# Altium PCB 边缘网关-17KF4-END.PcbDoc (part 2 of 2)
Units mil, origin at the board's own origin, x right, y up, seen from the top; angles counter-clockwise.
Board outline 8695 x 6025 mil, 2 copper layers (Top Layer, Bottom Layer); 152 components, 173 nets, 594 pads, 724 vias.
Unrouted connection lines stored in the file: 769.
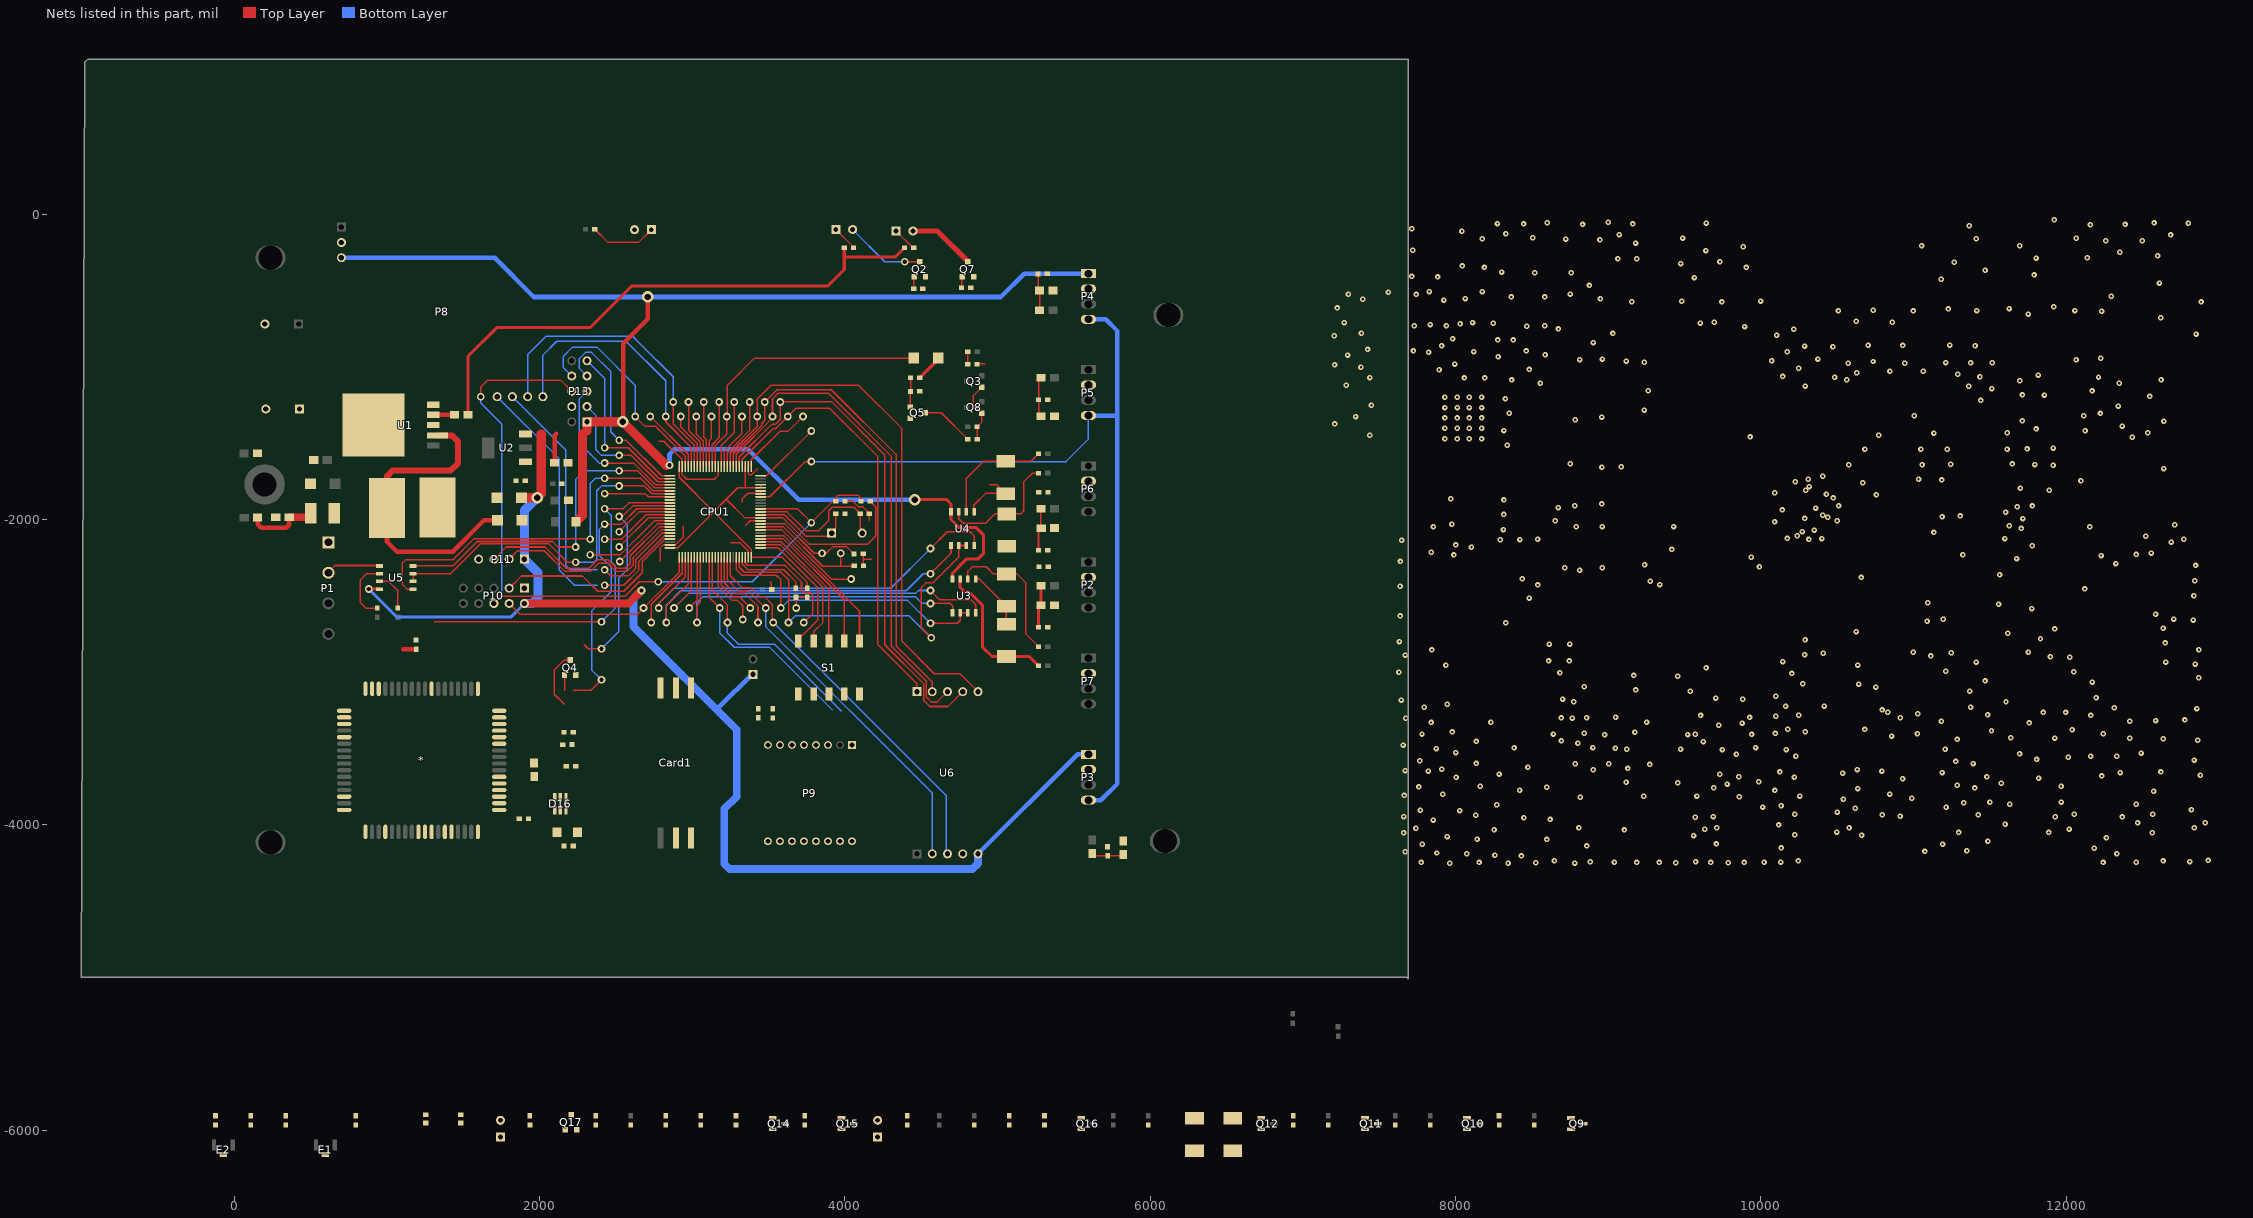
[diagram p2: the nets of this part, all layers, seen from the top]

## Via types
v1: diameter 36, hole 15, Top Layer to Bottom Layer, 626 vias
v2: diameter 50, hole 28, Top Layer to Bottom Layer, 92 vias
v3: diameter 75, hole 42, Top Layer to Bottom Layer, 6 vias

## Nets (pads, with @x,y where several pads share a name; then routed paths per layer and width w, separated by ;. In a path a pad name is that pad's centre, name@x,y a point inside that pad or via, vN(x,y) a via of type N, cw(c..) or ccw(c..) an arc to the next point about the centre after c; other vN are vias at no path point) (continued)
GND: *.1 *.4 *.18 *.19 *.23 *.24 *.34 *.35 *.42 *.52 *.53 *.55 *.57 *.66 *.68 C1.2 C2.1 C3.1 C4.2 C5.1 C6.1 C7.2 C8.2 C9.1 C10.1 C11.1 C12.1 C16.1 C17.1 C18.1 C19.2 C20.1 C21.1 C22.1 C23.1 C25.1 C28.1 C29.1 C30.1 CPU1.10 CPU1.19 CPU1.20 CPU1.27 CPU1.37 CPU1.49 CPU1.74 CPU1.99 D4.1 D5.1 D6.1 D8.1 D9.1 D11.2 D16.2 P1.2 P2.2 P3.2 P4.2 P5.2 P6.2 P7.2 P8.6 P9.14 P9.16 P10.1 P11.4 P13.7 Q2.2 Q4.2 Q5.1 Q7.2 Q14.2 Q17.2 R13.2 R14.1 R15.2 R16.2 R17.2 R18.2 R19.1 R38.1 R39.1 R41.2 R47.2 R50.2 R64.1 R70.2 S1.1 S1.2 S1.3 S1.4 S1.5 U1.3 U1.5 U2.1 U3.5 U4.5 U5.5 U6.9 | length 3265.4
  Top Layer w10: P1.2@614.16,-2345.77 658.75,-2301.18 U5.5@947.92,-2301.18 ; 2780.16,-1486.77 2813.16,-1486.77 2931.62,-1605.24 2931.62,-1649.53 2931.62,-1704.24 2963.47,-1736.09 3143.74,-1736.09 3168.83,-1711 CPU1.37@3168.83,-1652.27 ; 2788.14,-2274.51 2788.14,-2187.43 2809.52,-2166.05 2851.9,-2166.05 2852.68,-2165.27 2889.26,-2165.27 2941.16,-2113.37 2941.16,-2042.77 ; CPU1.37@3167.84,-1652.27 CPU1.37@3167.84,-1649.53 ; 3251.16,-2152.77 3312.16,-2152.77 3364.69,-2205.31 CPU1.99@3364.69,-2244.02 ; 3326,-1887 3326,-1864.93 3342.97,-1847.97 ; 3337,-1853.93 3342.97,-1847.97 ; 3351.16,-2033.77 3351.16,-2036.77 3379.36,-2008.57 CPU1.10@3446.39,-2008.57 ; CPU1.27@3364.69,-1649.53 3364.69,-1698.77 3372.69,-1706.77 3388.16,-1706.77 3426.16,-1668.77 ; CPU1.19@3445.4,-1828.66 3362.27,-1828.66 3342.97,-1847.97 ; CPU1.19@3447.24,-1826.82 CPU1.20@3447.24,-1812.2 ; 3509.16,-2407.77 3518.39,-2417 R47.2@3518.39,-2455.43 ; C22.1@3998.16,-1877.77 4049.07,-1877.77 4089.07,-1917.77 4118.16,-1917.77 4158.16,-1957.77 4158.16,-2004.77 ; C23.1@4119.16,-2299.77 4119.16,-2258.77 ; C25.1@4119.16,-2223.77 4119.16,-2258.77 ; 4175.16,-2258.77 4119.16,-2258.77 ; U4.5@4843.75,-1946.54 4843.75,-1907.18 4923.86,-1827.07 5051.16,-1827.07 4997.86,-1773.77 4948.16,-1773.77 ; U3.5@4853.75,-2386.54 4876.62,-2386.54 4972.86,-2482.77 5055.92,-2566.31 D5.1@5055.92,-2681.69 ; R41.2@4863.39,-980.43 4915.82,-980.43
  Top Layer w30: 1105.21,-2848.71 R38.1@1188.71,-2848.71
  other v1: 7961.16,-4251.77 8344.16,-4251.77 8780.16,-4250.77 8526.16,-4247.77 9442.16,-4247.77 9786.16,-4247.77 7775.16,-4246.77 8154.16,-4246.77 9186.16,-4246.77 9334.16,-4246.77 9672.16,-4246.77 9892.16,-4246.77 12242.16,-4246.77 9041.16,-4244.77 10021.16,-4244.77 12460.16,-4244.77 10131.16,-4243.77 9572.16,-4242.77 8882.16,-4241.77 12809.16,-4240.77 12635.16,-4236.77 10245.16,-4235.77 8648.16,-4234.77 12931.16,-4233.77 8430.16,-4203.77 8258.16,-4198.77 8073.16,-4189.77 12333.16,-4189.77 7878.16,-4184.77 7670.16,-4176.77 11075.16,-4174.77 11350.16,-4170.77 12185.16,-4153.77 10134.16,-4151.77 8859.16,-4138.77 7781.16,-4127.77 11190.16,-4126.77 9709.16,-4125.77 11488.16,-4107.77 8597.16,-4095.77 8141.16,-4094.77 12264.16,-4085.77 7946.16,-4076.77 9559.16,-4070.77 10660.16,-4067.77 10222.16,-4065.77 7659.16,-4052.77 12564.16,-4051.77 11296.16,-4049.77 11886.16,-4049.77 10497.16,-4047.77 9106.16,-4033.77 8252.16,-4032.77 9632.16,-4028.77 12019.16,-4027.77 7740.16,-4021.77 9711.16,-4019.77 8808.16,-4018.77 10578.16,-4018.77 12840.16,-4018.77 10116.16,-4000.77 11600.16,-3995.77 12468.16,-3985.77 12911.16,-3985.77 7853.16,-3968.77 8619.16,-3964.77 8448.16,-3953.77 9570.16,-3949.77 12368.16,-3948.77 11928.16,-3947.77 7661.16,-3945.77 9689.16,-3945.77 10912.16,-3944.77 8132.16,-3937.77 10795.16,-3934.77 11425.16,-3934.77 10222.16,-3931.77 12054.16,-3930.77 12568.16,-3930.77 10500.16,-3916.77 8028.16,-3906.77 7770.16,-3904.77 12821.16,-3901.77 10619.16,-3890.77 11213.16,-3884.77 10011.16,-3883.77 10132.16,-3874.77 8270.16,-3867.77 12459.16,-3865.77 11631.16,-3864.77 11330.16,-3855.77 11501.16,-3852.77 11968.16,-3850.77 10541.16,-3832.77 10988.16,-3825.77 8816.16,-3818.77 9858.16,-3815.77 9232.16,-3812.77 9581.16,-3811.77 10254.16,-3811.77 7663.16,-3807.77 7915.16,-3799.77 10844.16,-3798.77 12573.16,-3779.77 10092.16,-3774.77 8419.16,-3773.77 10634.16,-3762.77 11402.16,-3758.77 9691.16,-3757.77 8597.16,-3753.77 7760.16,-3751.77 8161.16,-3747.77 11967.16,-3746.77 11287.16,-3741.77 9779,-3733 11575.16,-3727.77 9456.16,-3723.77 9117.16,-3720.77 9987.16,-3717.77 10928.16,-3697.77 11819.16,-3695.77 10220.16,-3688.77 8003.16,-3687.77 11481.16,-3685.77 9855.16,-3684.77 12233.16,-3679.77 12880.16,-3675.77 9730.16,-3668.77 8285.16,-3667.77 10535.16,-3661.77 11187.16,-3657.77 12355.16,-3657.77 10125.16,-3653.77 12621.16,-3653.77 7820.16,-3647.77 10793.16,-3647.77 7671.16,-3644.77 8901.16,-3638.77 10631.16,-3637.77 7910.16,-3635.77 9129.16,-3630.77 8474.16,-3622.77 9273.16,-3604.77 8784.16,-3599.77 9004.16,-3599.77 11390.16,-3598.77 8136.16,-3597.77 11276.16,-3584.77 7765.16,-3580.77 12838.16,-3575.77 11806.16,-3571.77 12014.16,-3557.77 12160.16,-3551.77 12331.16,-3551.77 10230.16,-3550.77 9840.16,-3537.77 11695.16,-3533.77 12491.16,-3529.77 8001.16,-3526.77 9748.16,-3506.77 10167.16,-3506.77 9122.16,-3505.77 9474.16,-3504.77 11207.16,-3504.77 7873.16,-3500.77 9047.16,-3497.77 8383.16,-3494.77 8900.16,-3493.77 9965.16,-3493.77 7656.16,-3477.77 8802.14,-3465.51 9623.16,-3454.77 8135.16,-3453.77 8694,-3450 12863.16,-3445.77 11286.16,-3440.77 12637.16,-3436.77 12417.16,-3433.77 11925.16,-3431.77 11637.16,-3429.77 10856.16,-3418.77 8976.16,-3410.77 9520.16,-3408.77 9939.16,-3407.77 9570.14,-3406.51 7780.16,-3405.77 8641.16,-3405.77 11026.16,-3403.77 12244.16,-3402.77 10094.16,-3401.77 8843.16,-3400.77 9175.16,-3392.77 7979.16,-3391.77 10290.16,-3390.77 11511.16,-3383.77 12039.16,-3376.77 10681,-3375 10176,-3374 9724.16,-3348.77 9877.16,-3333.77 11759.16,-3332.77 7839.16,-3329.77 8232.16,-3327.77 9251.16,-3327.77 12417.16,-3321.77 11183.16,-3320.77 12586.16,-3316.77 12778.16,-3312.77 7674.16,-3302.77 8764.14,-3300.51 8693.16,-3299.77 8858.16,-3298.77 10913.16,-3298.77 9926,-3297 9048.16,-3295.77 10097.16,-3289.77 9605.16,-3283.77 12162.16,-3283.77 10248.16,-3282.77 11485.16,-3278.77 11027.16,-3272.77 11850.16,-3263.77 11996.16,-3263.77 10832,-3262 10794.16,-3247.77 12857.16,-3238.77 12316.16,-3232.77 11374.16,-3230.77 7794.16,-3229.77 10162.16,-3223.77 10415.16,-3221.77 7945.16,-3210.77 11606.16,-3194.77 8774.16,-3193.77 7644.16,-3182.77 9882.16,-3177.77 8701.14,-3176.51 9704.16,-3169.77 12196.16,-3167.77 10097.16,-3158.77 9538.16,-3125.77 11369.16,-3125.77 9180.16,-3116.77 10753.16,-3097.77 8843.16,-3094.77 10641.16,-3077.77 10274.16,-3076.77 12171.16,-3064.77 11469.16,-3057.77 12868.16,-3035.77 9455,-3026 9168.16,-3021.77 10202.16,-3008.77 8684.16,-3003.77 7629.16,-2999.77 12049.16,-2997.77 11212.16,-2993.77 9641.16,-2970.77 7937.16,-2954.77 10634.16,-2953.77 12845.16,-2946.77 11411.16,-2933.77 12653.16,-2933.77 10143.16,-2930.77 8609.16,-2926.77 8745.16,-2926.77 12023.16,-2902.77 11897.16,-2899.77 11113.16,-2893.77 7671.16,-2887.77 10286.14,-2885.51 10408.16,-2876.77 11247.16,-2873.77 11753.16,-2869.77 10999.16,-2868.77 7843.16,-2854.77 12870.16,-2852.77 8614.16,-2815.77 8748.16,-2815.77 12649.16,-2808.77 7632.16,-2799.77 10290,-2787 11832.16,-2780.77 11617.16,-2745.77 10625,-2734 11926.16,-2716.77 12635.16,-2711.77 8328.16,-2675.77 11089.16,-2665.77 12832.16,-2658.77 11195.16,-2652.77 12705.16,-2651.77 7637.16,-2631.77 12586.16,-2620.77 11774.14,-2583.51 11557.16,-2555.77 11093.16,-2544.77 8482.16,-2514.77 12837.16,-2498.77 12121.86,-2454.77 7636.16,-2436.77 8538.16,-2428.77 9337.16,-2425.77 9275.16,-2404.77 12842.16,-2400.77 8437.16,-2387.77 10658.16,-2379.77 11564.16,-2361.77 8812.16,-2332.77 8716.16,-2316.77 8961.16,-2315.77 9991,-2310 12848.16,-2300.77 9238.16,-2296.77 12326.16,-2288.77 7639.16,-2274.77 11675.16,-2255.77 9937.14,-2246.51 12229.16,-2235.77 7989.16,-2231.77 11324.16,-2230.77 12459.16,-2228.77 12558.16,-2219.77 7840.16,-2213.77 9417.16,-2195.77 8104.16,-2181.77 11778.16,-2171.77 8002.16,-2166.77 12689.16,-2147.77 7646.16,-2135.77 8293,-2133 8422,-2131 10315.16,-2130.77 8537,-2129 12770.16,-2128.77 10400.16,-2124.77 11599.16,-2124.77 10173.16,-2123.77 12522.16,-2108.77 10239,-2106 11134.16,-2084.77 10271,-2079 10350,-2069 8314,-2066 11706.16,-2058.77 7855.16,-2046.77 8791.16,-2046.77 12154.16,-2046.77 8961.16,-2045.77 9428.16,-2045.77 11627.16,-2040.77 12711.16,-2034.77 7976.16,-2031.77 10090.16,-2014.77 10500.16,-2008.77 8654,-2008 11717.16,-1993.77 10288,-1993 10439,-1986 11187.16,-1982.77 11307.16,-1976.77 10405,-1972 8315,-1967 11603.16,-1951.77 10140,-1937 10358.16,-1924.77 8673.16,-1921.77 11680.16,-1915.77 11779.16,-1910.77 10509,-1910 8781,-1909 8957.16,-1897.77 8317,-1872 7969.16,-1864.77 10475,-1859 10757.16,-1837.77 10430.16,-1833.77 10091.16,-1824.77 11889.16,-1808.77 10294.16,-1807.77 11701,-1795 10318,-1784 10667,-1760 10226.16,-1751.77 12097.16,-1745.77 11185.16,-1740.77 11033.16,-1736.77 10310,-1736 10406.16,-1716.77 12640,-1666 8959.16,-1656.77 9086.16,-1653.77 11914.16,-1643.77 10575.16,-1640.77 11056.16,-1640.77 11794.16,-1639.77 11244.16,-1637.77 11647.16,-1635.77 8751.16,-1633.77 10682.16,-1539.77 11221.16,-1539.77 11049.16,-1538.77 11613.16,-1538.77 11744.16,-1537.77 11915.16,-1531.77 8339,-1513 7930.16,-1470.77 8010.16,-1470.77 8090.16,-1470.77 8170.16,-1470.77 12434.16,-1461.77 9929.16,-1458.77 7438,-1448 10773.16,-1447.77 11134.16,-1433.77 11615.16,-1430.77 12535.16,-1430.77 12124.16,-1418.77 8317,-1417 11803.16,-1406.77 7930.16,-1402.77 8010.16,-1402.77 8090.16,-1402.77 8170.16,-1402.77 12368.16,-1387.77 7209.16,-1373.77 12641.16,-1356.77 11712.16,-1353.77 8784.16,-1345.77 7930.16,-1334.77 8010.16,-1334.77 8090.16,-1334.77 8170.16,-1334.77 8958.16,-1328.77 7345.16,-1325.77 11005.16,-1320.77 12115.16,-1319.77 12225.16,-1304.77 8352,-1303 9236.16,-1282.77 7930.16,-1266.77 8010.16,-1266.77 8090.16,-1266.77 8170.16,-1266.77 12342.16,-1256.77 7449.16,-1250.77 11441.16,-1219.77 8327,-1208 7930.16,-1198.77 8010.16,-1198.77 8090.16,-1198.77 8170.16,-1198.77 12547.16,-1193.77 11858.16,-1184.77 11714.16,-1183.77 12170.16,-1157.77 9263.16,-1156.77 11512.16,-1141.77 11362.16,-1126.77 10290.16,-1125.77 7284.16,-1120.77 8556.16,-1107.77 12347.16,-1106.77 11696.16,-1091.77 8367.16,-1085.77 10563.16,-1084.77 12622.16,-1083.77 8058.16,-1072.77 8191.16,-1072.77 7439.16,-1069.77 10483.16,-1067.77 12212.16,-1066.77 11435.16,-1064.77 10143.16,-1062.77 11818.16,-1053.77 11290.16,-1047.77 10628.16,-1037.77 10846.16,-1027.77 11063.16,-1027.77 7892.16,-1018.77 8482.16,-1016.77 10249.16,-1009.77 7380.16,-1002.77 7207.16,-986.77 7994.16,-981.77 10572.16,-975.77 10943.16,-975.77 11374.16,-973.77 11515.16,-973.77 11212.16,-971.77 9236.16,-968.77 10735.16,-964.77 9118.16,-961.77 10070.16,-960.77 8813.16,-951.77 12064.82,-952.43 8962.16,-948.77 10374.16,-948.77 12227.16,-943.77 8278.16,-933.77 7292.16,-922.77 8586.16,-919.77 7823.16,-903.77 10172.16,-900.77 8119.16,-899.77 7724.16,-895.77 8463.16,-895.77 7423.16,-885.77 10472.16,-868.77 10286.16,-863.77 7908.16,-861.77 11403.16,-860.77 10929.16,-859.77 10702.16,-857.77 11238.16,-856.77 8902.16,-840.77 8277.16,-823.77 8378.16,-823.77 7980.16,-815.77 7205.16,-796.77 10103.16,-792.77 12851.16,-784.77 9031.16,-780.77 7383.16,-778.77 10215.16,-752.77 8674.16,-751.77 9893.16,-735.77 8466.16,-733.77 7730.16,-730.77 7940.16,-730.77 8584.16,-730.77 7834.16,-722.77 8029.16,-717.77 8247.16,-714.77 9602.16,-712.77 7271.16,-709.77 8111.16,-709.77 9695.16,-707.77 10860.16,-707.77 10625.16,-700.77 12619.16,-678.77 11752.16,-653.77 12232.16,-635.77 10999.16,-633.77 10508.16,-631.77 11414.16,-630.77 12058.16,-630.77 10736.16,-628.77 11227.16,-620.77 11626.16,-617.77 7225.16,-613.77 11919.16,-605.77 9745.16,-574.77 12884.16,-574.77 9154.16,-572.77 9482.16,-569.77 9998.16,-568.77 7924.14,-562.51 7391.14,-557.51 8949.16,-553.77 8063.14,-552.51 8365.16,-541.77 8584.16,-541.77 12295.16,-536.77 7743.16,-525.77 7298.14,-523.51 8752.16,-522.77 7560.14,-510.51 7828.16,-506.77 8175.16,-506.77 8877.16,-466.77 12611.16,-450.77 11182.16,-425.77 9565.16,-414.77 7882.16,-410.77 7712.16,-407.77 11790.16,-397.77 8519.16,-383.77 8757.16,-383.77 8301.16,-378.77 11469.16,-367.77 8189.16,-348.77 9905.16,-348.77 8044.14,-338.51 9476.16,-322.77 11267.16,-314.77 9732.16,-310.77 9064.16,-290.77 9187.16,-290.77 11803.16,-286.77 12139.16,-284.77 12599.16,-271.77 12351.16,-248.77 9640.16,-237.77 7719.14,-236.51 9884.16,-212.77 11053.16,-205.77 11697.16,-205.77 9179.16,-188.77 12260.16,-173.77 12498.16,-173.77 8946.16,-167.77 8722.16,-162.77 11412.16,-160.77 8175.16,-159.77 12066.16,-157.77 9487.16,-155.77 8506.16,-154.77 12684.16,-135.77 9072.16,-132.77 8330.16,-127.77 8042.16,-111.77 7712.14,-94.51 11366.16,-74.77 12159.16,-69.77 8832.16,-66.77 12386.16,-66.77 8445.16,-63.77 9160.16,-63.77 8274.16,-60.77 12801.16,-59.77 9643.16,-57.77 12576.16,-56.77 8600.16,-55.77 9000.16,-52.77 11922.16,-36.77
GPIO0: P9.10
GPIO2: P9.12
GPIO4: P9.6
GPIO5: P9.8
GPIO12: P9.11
GPIO13: P9.13
GPIO14: P9.9
GPIO16: P9.7
INVCC: F1.2 P1.1
LED_STATUS: R35.2
NetC8_1: C8.1 R7.1 R14.2 | length 251.8
  Top Layer w10: C8.1@5267.67,-2201 R14.2@5267.67,-2073.86 ; R14.2@5283.39,-2054.23 R7.1@5283.39,-1929.57
NetC9_2: C9.2 R8.1 R15.1 | length 255.7
  Top Layer w20: C9.2@5267.97,-2705.97 R15.1@5267.97,-2576.65 ; R15.1@5283.39,-2561.24 R8.1@5283.39,-2434.9
NetC10_2: C10.2 R9.1 R16.1 | length 243.6
  Top Layer w10: R16.1@5267.97,-1308.82 C10.2@5267.97,-1216.31 5267.97,-1086.99 R9.1@5283.39,-1071.57
NetC11_2: C11.2 R10.1 R17.1 | length 180.8
  Top Layer w10: R10.1@5633.99,-4203.23 C11.2@5720.34,-4203.23 R17.1@5814.77,-4203.23
NetC12_2: C12.2 R11.1 R18.1 | length 228.4
  Top Layer w10: R18.1@5264.77,-489.77 C12.2@5264.77,-391.34 ; R11.1@5275,-630 R18.1@5275,-500
NetC27_1: C27.1 E1.1
NetC27_2: C27.2
NetC30_2: C30.2 E2.1 R52.2
NetCard1_2: Card1.2 D16.6 R45.1
NetCard1_3: Card1.3 D16.4 R44.1
NetCard1_5: Card1.5 D16.1
NetCard1_6: Card1.6 D16.5 R46.1 R48.1
NetD2_1: D2.1 F1.1 R12.1 R13.1 | length 430
  Top Layer w30: R12.1@152,-1987 152,-2030 176,-2054 340,-2054 359,-2035 R13.1@359,-1986
  Top Layer w50: R13.1@359,-1986 F1.1@472.23,-1986
NetD4_2: D4.2 L1.1 U1.2 | length 2056.1
  Top Layer w30: L1.1@999.69,-1925 999.69,-2144.69 1065,-2210 1430,-2210 1634.98,-2005.02 D4.2@1722.83,-2005.02
  Top Layer w40: L1.1@999.69,-1925 999.69,-1715.31 1035,-1680 1415,-1680 1465,-1630 1465,-1490 1424,-1449 U1.2@1331,-1449
NetD5_2: D5.2 D19.2 R3.2 R20.1 U3.7 | length 942
  Top Layer w20: U3.7@4754.8,-2389.76 4754.8,-2444.8 4785,-2475 4815,-2475 4900,-2560 4900,-2835 4962.52,-2897.52 D5.2@5057.77,-2897.52 5206.19,-2897.52 R20.1@5267.67,-2959
NetD6_2: D6.2 D18.2 R2.2 R21.1 U4.7 | length 828.1
  Top Layer w10: U4.7@4744.8,-1949.76 4744.8,-1994.8 4775,-2025 4920,-2025 4981.3,-1963.7 D6.2@5060,-1963.7 5151.3,-1963.7 5170,-1945 5170,-1755 5229.33,-1695.67 R21.1@5267.67,-1695.67
NetD8_2: D8.2 D19.1 R3.1 R25.1 U3.6 | length 937.5
  Top Layer w10: U3.6@4805.2,-2389.76 4805.2,-2339.8 4835,-2310 4925,-2310 4971.7,-2356.7 D8.2@5058,-2356.7 5126.7,-2356.7 5185,-2415 5185,-2750 R25.1@5267.67,-2832.67
NetD9_2: D9.2 D18.1 R2.1 R26.1 U4.6 | length 758.9
  Top Layer w10: U4.6@4795.2,-1949.76 4795.2,-1729.8 4907.3,-1617.7 D9.2@5053,-1617.7 5219.3,-1617.7 R26.1@5267.67,-1569.33
NetD10_2: D10.2 R51.2
NetD11_1: D11.1 R28.2 | length 441.3
  Top Layer w10: R28.2@2360.23,-98.66 2446.57,-185 2647,-185 D11.1@2731,-101
NetD12_1: D12.1 R29.1 | length 144
  Top Layer w10: D12.1@3679,-2510 R29.1@3754,-2510 ; v2(3680,-2580) D12.1@3680,-2511
NetD13_1: D13.1 R33.2 | length 166.4
  Top Layer w10: D13.1@3940,-100 4055.23,-215.23 R33.2@4055.23,-218.66
NetD13_2: D13.2 Q2.3 | length 527.3
  Top Layer w10: v2(4390.79,-310.79) Q2.3@4490,-310.79
  Bottom Layer w10: D13.2@4050,-100 4260.79,-310.79 v2(4390.79,-310.79)
NetD14_2: D14.2 R37.1 | length 171.7
  Top Layer w20: R37.1@4489.81,-1071 D14.2@4611.21,-949.6
NetD15_1: D15.1 R40.2 | length 153.7
  Top Layer w10: D15.1@4335,-110 R40.2@4443.66,-218.66
NetD15_2: D15.2 Q7.3 | length 443.2
  Top Layer w35: D15.2@4445,-110 4604.21,-110 Q7.3@4805,-310.79
NetD17_2: D17.2 R71.2
NetL2_2: 
NetLED1_2: LED1.2 R41.1 | length 82.4
  Top Layer w10: R41.1@4805.3,-983.7 LED1.2@4805.3,-901.34
NETLIGHT: *.51 R49.1
NetQ2_1: Q2.1 R35.1 | length 76.6
  Top Layer w10: R35.1@4450,-489 Q2.1@4450,-412.42
NetQ3_2: Q3.2 Q8.2 R32.2 R34.1 | length 401.7
  Top Layer w10: R34.1@4865.23,-1474.7 R32.2@4865.23,-1392.66 4896.84,-1361.05 Q8.2@4896.84,-1303.4 4841,-1247.56 4841,-1188.25 Q3.2@4896.84,-1132.4
NetQ4_1: Q4.1 R49.2 R50.1 | length 100.9
  Top Layer w10: 2160,-3119 2162.6,-3116.4 Q4.1@2162.6,-3019.21
NetQ4_3: Q4.3 R51.1 | length 381.9
  Top Layer w10: 2160,-3209 2095,-3144 2095,-2986 2160.21,-2920.79 Q4.3@2200,-2920.79
NetQ5_2: Q5.2 R37.2 R39.2 | length 189.3
  Top Layer w10: Q5.2@4427.57,-1262.6 R39.2@4427.57,-1163.35 ; R39.2@4429.58,-1161.34 R37.2@4429.58,-1071.34
NetQ5_3: Q5.3 R34.2 | length 351.9
  Top Layer w10: Q5.3@4526,-1300 4629.96,-1300 R34.2@4805.3,-1475.34
NetQ7_1: Q7.1 R42.1 | length 68.9
  Top Layer w10: R42.1@4763.67,-482 Q7.1@4763.67,-413.14
NetQ9_1: Q9.1 R54.2
NetQ10_1: Q10.1 R56.2
NetQ11_1: Q11.1 R58.2
NetQ12_1: Q12.1 R60.2
NetQ14_1: Q14.1 R63.1 R64.2
NetQ15_1: Q15.1 R65.1 R66.2
NetQ16_1: Q16.1 R68.2
NetQ17_1: Q17.1 R69.2 R70.1
NetQ17_3: Q17.3 R71.1
NetR1_2: R1.2 U1.4 | length 138.6
  Top Layer w30: U1.4@1303.43,-1314.07 1441.75,-1314.07 R1.2@1441.96,-1314.28
NetR22_1: R22.1 U5.7 | length 260.4
  Top Layer w10: U5.7@949.76,-2405.2 1010.2,-2405.2 1071,-2466 R22.1@1071,-2580
NetR27_1: R27.1 U5.6 | length 416.9
  Top Layer w10: R27.1@936,-2580 860,-2580 825,-2545 825,-2395 865.2,-2354.8 U5.6@949.76,-2354.8
NIRQ: CPU1.33 U6.5 | length 3647.5
  Top Layer w10: CPU1.33@3248.43,-1652.76 3248.43,-1566.57 3425,-1390 v2(3425,-1325) 3425,-1210 3515,-1120 4088.43,-1120 4373,-1404.57 4373,-2798 4585,-3010 4753.97,-3010 U6.5@4871.49,-3127.52
NRST: C22.2 CPU1.14 P10.8 P13.8 R43.2 | length 5252.5
  Top Layer w10: v2(1614,-1195) 1614,-1131 1656,-1089 2139,-1089 P13.8@2210,-1160 ; P10.8@1700,-2550 1748,-2502 2558,-2502 2652,-2408 v2(2777,-2408) ; CPU1.14@3447.24,-1930.31 3690.31,-1930.31 v2(3780,-2020) 3918.66,-1881.34 C22.2@3939.77,-1881.34 3939.77,-1855.23 3955,-1840 4084.77,-1840 4104.77,-1860 R43.2@4104.77,-1881.34
  Bottom Layer w10: v2(1614,-1195) 1614,-1236 1750,-1372 1750,-2500 P10.8@1700,-2550 ; v2(2777,-2408) 3392,-2408 v2(3780,-2020)
NSEL: CPU1.29 U6.1 | length 2849.9
  Top Layer w10: CPU1.29@3327.17,-1652.76 3327.17,-1605.83 3528,-1405 3545,-1405 v2(3625,-1325) 3677.5,-1272.5 3900.5,-1272.5 4216,-1588 4216,-2820.05 4471.49,-3075.54 U6.1@4471.49,-3127.52
NTRST: CPU1.90 | length 436.9
  Top Layer w10: CPU1.90@3189.37,-2247.24 3189.37,-2429.37 3266.16,-2506.16 3309.22,-2506.16 3380,-2576.95 v2(3380,-2580)
OSC32_IN: C23.2 CPU1.8 Y2.1 | length 804.3
  Top Layer w10: CPU1.8@3447.24,-2048.43 3597,-2048.43 3854.6,-2306.02 3964,-2306.02 C23.2@4060.77,-2306.02 ; 3972.02,-2305.05 Y2.1@3972.02,-2221
OSC32_OUT: C25.2 CPU1.9 Y2.2 | length 730.1
  Top Layer w10: CPU1.9@3447.24,-2028.74 3607,-2028.74 3799.26,-2221 Y2.2@3849.98,-2221 3877,-2221 3921,-2177 4010.43,-2177 C25.2@4059.27,-2225.83
OSC_IN: C16.2 CPU1.12 Y1.1 | length 662.7
  Top Layer w10: CPU1.12@3447.24,-1969.68 3604.68,-1969.68 3745,-2110 3891,-2110 Y1.1@3912,-2089 ; Y1.1@3912,-2081 3939.77,-2053.23 C16.2@3939.77,-1961.34
OSC_OUT: C17.2 CPU1.13 Y1.2 | length 935.8
  Top Layer w10: CPU1.13@3447.24,-1950 3620,-1950 3744,-2074 3826.11,-2074 3893.11,-2007 3893.11,-1941.89 3915,-1920 4058.43,-1920 C17.2@4099.77,-1961.34 4099.77,-2059.77 Y1.2@4110,-2070
PA2: CPU1.25 | length 454.4
  Top Layer w10: CPU1.25@3447.24,-1713.78 3486.22,-1713.78 v2(3780,-1420)
PA3: CPU1.26 | length 500.3
  Top Layer w10: CPU1.26@3386.22,-1652.76 3386.22,-1608.78 3572,-1423 3627,-1423 v2(3725,-1325)
PA5: CPU1.30 U6.4 | length 3404.2
  Top Layer w10: CPU1.30@3307.48,-1652.76 3307.48,-1589.52 3522,-1375 3547,-1375 3575,-1347 v2(3575,-1230) 3914,-1230 4261,-1577 4261,-2821 4514.96,-3074.96 4514.96,-3184.33 4555.63,-3225 4674.01,-3225 U6.4@4771.49,-3127.52
PA6: CPU1.31 U6.3 | length 3349.4
  Top Layer w10: CPU1.31@3287.8,-1652.76 3287.8,-1572.46 v2@3525,-1335.25 ; v2(3525,-1325) 3525,-1210 3563,-1172 3890,-1172 4302,-1584 4302,-2827 4530.96,-3055.96 4530.96,-3160.96 4566,-3196 4603.01,-3196 U6.3@4671.49,-3127.52
PA7: CPU1.32 U6.2 | length 3228.4
  Top Layer w10: CPU1.32@3268.11,-1652.76 3268.11,-1569.52 3454.35,-1383.28 3454.35,-1372.65 3475,-1352 v2(3475,-1230) 3555,-1150 3910.58,-1150 4334.31,-1573.74 4334.31,-2826.69 4571.49,-3063.86 U6.2@4571.49,-3127.52
PA8: CPU1.67 | length 429.8
  Top Layer w10: v2(2525,-2275) 2771.26,-2028.74 CPU1.67@2852.76,-2028.74
PA9: CPU1.68 P11.3 | length 1431.6
  Top Layer w10: P11.3@1700,-2260 1780,-2180 2035,-2180 2174,-2319 2323,-2319 2379,-2263 2448,-2263 2504.5,-2319.5 2560.5,-2319.5 2592.7,-2287.3 2592.7,-2237.3 2781.57,-2048.43 CPU1.68@2852.76,-2048.43
PA10: CPU1.69 P11.2 | length 1317.5
  Top Layer w10: P11.2@1800,-2260 1855,-2205 2030,-2205 2165,-2340 2332,-2340 2387,-2285 2445,-2285 2500,-2340 2570,-2340 2614,-2296 2614,-2248.37 2794.26,-2068.11 CPU1.69@2852.76,-2068.11
PA11: CPU1.70 P8.3 | length 2062.6
  Top Layer w10: v2(2425,-2330) 2462,-2367 2583,-2367 2630,-2320 2630,-2260 2802.2,-2087.8 CPU1.70@2852.76,-2087.8
  Bottom Layer w10: P8.3@1821,-1195 2169.47,-1543.47 2169.47,-2299.47 2200,-2330 2376.72,-2330
PA12: CPU1.71 P8.2 | length 2188.7
  Top Layer w10: v2(2425,-2430) 2550,-2430 2650,-2330 2650,-2273.54 2816.06,-2107.48 CPU1.71@2852.76,-2107.48
  Bottom Layer w10: P8.2@1721,-1195 2129,-1603 2129,-2332 2227,-2430 2244,-2430 2376.72,-2430
PB0: CPU1.35 | length 375.8
  Top Layer w10: CPU1.35@3209.06,-1652.76 3209.06,-1550.94 3325,-1435 v2(3325,-1325)
PB1: CPU1.36 | length 458.2
  Top Layer w10: CPU1.36@3189.37,-1652.76 3189.37,-1515.63 3275,-1430 v2(3275,-1230)
PB5: CPU1.91 | length 557.4
  Top Layer w10: CPU1.91@3209.06,-2247.24 3209.06,-2414.06 3280.08,-2485.08 3345.08,-2485.08 3430,-2570 v2(3430,-2675)
PB6: CPU1.92 U6.7 | length 2537.5
  Top Layer w10: CPU1.92@3228.74,-2247.24 3228.74,-2393.74 3302.5,-2467.5 3367.5,-2467.5 v2(3480,-2580)
  Bottom Layer w10: v2(3480,-2580) 3480,-2700 4571.49,-3791.49 U6.7@4571.49,-4190.51
PB7: CPU1.93 U6.8 | length 2584.3
  Top Layer w10: CPU1.93@3248.43,-2247.24 3248.43,-2368.43 3327.85,-2447.85 3382.85,-2447.85 3439.49,-2504.49 3472.49,-2504.49 3524,-2556 3524,-2669 v2(3530,-2675)
  Bottom Layer w10: v2(3530,-2675) 4664.1,-3809.1 4664.1,-4183.13 U6.8@4671.49,-4190.51
PB8: CPU1.95 U3.2 U3.3 | length 1951.8
  Top Layer w10: CPU1.95@3287.8,-2247.24 3287.8,-2327.8 3324.5,-2364.5 3549.5,-2364.5 3580,-2395 v2(3580,-2580) ; v2(4560,-2680) 4735,-2680 4754.8,-2660.2 U3.2@4754.8,-2610.24 U3.3@4805.2,-2610.24
  Bottom Layer w10: v2(3580,-2580) 3630,-2530 4410,-2530 v2(4560,-2680)
PB9: CPU1.96 U4.2 U4.3 | length 2525.5
  Top Layer w10: CPU1.96@3307.48,-2247.24 3307.48,-2312.48 3340,-2345 3580,-2345 3630,-2395 v2(3630,-2675) ; v2(4565,-2775) 4500,-2710 4500,-2445 4530,-2415 4575,-2415 4744.8,-2245.2 U4.2@4744.8,-2170.24 U4.3@4795.2,-2170.24
  Bottom Layer w10: v2(3630,-2675) 3675,-2630 4420,-2630 v2(4565,-2775)
PB10: CPU1.47 | length 430.4
  Top Layer w10: v2(2725,-1325) 2972.83,-1572.83 CPU1.47@2972.83,-1652.76
PB11: CPU1.48 P13.9 | length 1460.9
  Top Layer w10: v2(2625,-1325) 2690,-1390 2760,-1390 2953.15,-1583.15 CPU1.48@2953.15,-1652.76
  Bottom Layer w10: P13.9@2210,-1060 2155,-1005 2155,-930 2215,-870 2375,-870 2625,-1120 v2(2625,-1325)
PB12: CPU1.51 P13.4 | length 1311.4
  Top Layer w10: v2(2520,-1480) 2565,-1480 2798.78,-1713.78 CPU1.51@2852.76,-1713.78
  Bottom Layer w10: P13.4@2310,-1060 2260,-1010 2260,-945 2300,-905 2340,-905 2465,-1030 2465,-1425 v2(2520,-1480)
PB13: CPU1.52 P13.5 | length 1129.7
  Top Layer w10: v2(2425,-1530) 2580,-1530 2783.46,-1733.46 CPU1.52@2852.76,-1733.46
  Bottom Layer w10: P13.5@2310,-960 2425,-1075 v2(2425,-1530)
PB14: CPU1.53 P13.2 | length 878.8
  Top Layer w10: v2(2520,-1580) 2600,-1580 2773.15,-1753.15 CPU1.53@2852.76,-1753.15
  Bottom Layer w10: P13.2@2310,-1260 2368,-1318 2368,-1543 2405,-1580 v2(2520,-1580)
PB15: CPU1.54 P13.3 | length 1066.5
  Top Layer w10: v2(2425,-1630) 2615,-1630 2757.83,-1772.83 CPU1.54@2852.76,-1772.83
  Bottom Layer w10: P13.3@2310,-1160 2260,-1210 2260,-1500 2390,-1630 v2(2425,-1630)
PC3: CPU1.18 P3.4 P4.4 P5.4 | length 6070.4
  Top Layer w10: CPU1.18@3447.24,-1851.57 3507.43,-1851.57 3739,-1620 v2(3780,-1620)
  Bottom Layer w10: v2(3780,-1620) 5448,-1620 5595,-1473 P5.4@5595,-1318.62 P5.4@5596.38,-1318.62
  Bottom Layer w30: P3.4@5595,-3838.31 5676.69,-3838.31 5785,-3730 5785,-1320 ; P4.4@5595,-688.7 5708.7,-688.7 5785,-765 5785,-1320 ; P5.4@5596.38,-1320 5785,-1320
PC5: CPU1.34 | length 483.3
  Top Layer w10: CPU1.34@3228.74,-1652.76 3228.74,-1563.63 3375,-1417.37 v2(3375,-1230)
PC6: CPU1.63 | length 386.6
  Top Layer w10: v2(2520,-2080) 2570,-2030 2650,-1950 CPU1.63@2852.76,-1950
PC7: CPU1.64 | length 494.2
  Top Layer w10: v2(2425,-2130) 2535,-2130 2695.32,-1969.68 CPU1.64@2852.76,-1969.68
PC8: CPU1.65 | length 411.7
  Top Layer w10: v2(2520,-2180) 2710.63,-1989.37 CPU1.65@2852.76,-1989.37
PC9: CPU1.66 | length 614.3
  Top Layer w10: v2(2330,-2230) 2530,-2230 2750.94,-2009.06 CPU1.66@2852.76,-2009.06
PC10: CPU1.78 U4.4 | length 2770
  Top Layer w10: v2(2780,-2580) 2780,-2550 2953.15,-2376.85 CPU1.78@2953.15,-2247.24 ; v2(4560,-2190) 4670,-2080 4820,-2080 4845.59,-2105.59 U4.4@4845.59,-2170.24
  Bottom Layer w10: v2(2780,-2580) 2780,-2550 2880,-2450 2925,-2450 4300,-2450 v2(4560,-2190)
PC11: CPU1.79 U4.1 | length 2657.3
  Top Layer w10: v2(2830,-2675) 2830,-2565 2972.83,-2422.17 CPU1.79@2972.83,-2247.24 ; v2(4560,-2355) 4694.41,-2220.59 U4.1@4694.41,-2170.24
  Bottom Layer w10: v2(2830,-2675) 2830,-2560 2924,-2466 4401,-2466 4512,-2355 v2(4560,-2355)
PC12: CPU1.80 U3.4 | length 2494.8
  Top Layer w10: v2(2880,-2580) 2992.52,-2467.48 CPU1.80@2992.52,-2247.24 ; v2(4560,-2465) 4620,-2525 4825,-2525 4855.59,-2555.59 U3.4@4855.59,-2610.24
  Bottom Layer w10: v2(2880,-2580) 2978,-2482 4465,-2482 4482,-2465 v2(4560,-2465)
PC13: CPU1.7 | length 726.1
  Top Layer w10: CPU1.7@3447.24,-2068.11 3588,-2068.11 3909.89,-2390 v2(4040,-2390)
PD0: CPU1.81 P9.1
PD1: CPU1.82 | length 371.4
  Top Layer w10: v2(2980,-2580) 3031.89,-2528.11 3031.89,-2502 ; 3031.89,-2519.11 3031.89,-2502 ; CPU1.82@3031.89,-2247.24 3031.89,-2502
PD2: CPU1.83 U3.1 | length 2328.1
  Top Layer w10: v2(3030,-2675) 3030,-2565 3051.57,-2543.43 CPU1.83@3051.57,-2247.24 ; v2(4560,-2550) 4690,-2550 4704.41,-2564.41 U3.1@4704.41,-2610.24
  Bottom Layer w10: v2(3030,-2675) 3030,-2545 3070,-2505 4460,-2505 4505,-2550 v2(4560,-2550)
PD3: CPU1.84 Q11.3 R57.2
PD4: CPU1.85 Q12.2
PD5: CPU1.86 P9.4 Q10.2 R24.2 | length 1471.1
  Top Layer w10: CPU1.86@3110.63,-2247.24 3110.63,-2510.63 v2(3180,-2580)
  Bottom Layer w10: v2(3180,-2580) 3180,-2743 3270.52,-2833.52 3275,-2838 3508,-2838 3917.57,-3247.57
PD6: CPU1.87 P9.2 Q9.3 R23.2 R53.2 | length 1495.3
  Top Layer w10: CPU1.87@3130.32,-2247.24 3130.32,-2460.32 3230,-2560 v2(3230,-2675)
  Bottom Layer w10: v2(3230,-2675) 3230,-2745 3297,-2812 3302.52,-2817.52 3537.52,-2817.52 3975,-3255
PD7: CPU1.88 P9.5
PD8: CPU1.55 U5.4 | length 2276.5
  Top Layer w10: U5.4@1170.24,-2304.41 1430.59,-2304.41 1591,-2144 2084,-2144 2120,-2180 v2(2235,-2180) ; v2(2520,-1680) 2640,-1680 2752.52,-1792.52 CPU1.55@2852.76,-1792.52
  Bottom Layer w10: v2(2235,-2180) 2235,-1738 2293,-1680 2342,-1680 v2(2520,-1680)
PD9: CPU1.56 U5.1 | length 2842
  Top Layer w10: U5.1@1170.24,-2455.59 1130.59,-2455.59 1100,-2425 1100,-2285 1120,-2265 1430,-2265 1570,-2125 1935,-2125 ; v2@2320,-2125 1935,-2125 ; v2(2330,-2130) 2325,-2125 1935,-2125 ; v2(2425,-1730) 2660,-1730 2742.2,-1812.2 CPU1.56@2852.76,-1812.2
  Bottom Layer w10: v2(2330,-2130) 2330,-1766 2366,-1730 v2(2425,-1730)
PD10: CPU1.57 U5.2 U5.3 | length 2355.5
  Top Layer w10: U5.2@1170.24,-2405.2 U5.3@1170.24,-2354.8 1415.2,-2354.8 1610,-2160 2060,-2160 2180,-2280 v2(2235,-2280) ; v2(2520,-1780) 2685,-1780 2736.89,-1831.89 CPU1.57@2852.76,-1831.89
  Bottom Layer w10: v2(2235,-2280) 2355,-2280 2373,-2262 2373,-1812 2405,-1780 v2(2520,-1780)
PD11: CPU1.58 Q16.2 | length 436.7
  Top Layer w10: v2(2425,-1830) 2690,-1830 2711.57,-1851.57 CPU1.58@2852.76,-1851.57
PE0: CPU1.97 D12.2 | length 485.8
  Top Layer w10: CPU1.97@3327.17,-2247.24 3327.17,-2292.17 3364,-2329 3599,-2329 3678.66,-2408.66 D12.2@3678.66,-2449.77
PE1: CPU1.98 | length 803.5
  Top Layer w10: CPU1.98@3346.85,-2247.24 3346.85,-2286.85 3360,-2300 3605,-2300 3629,-2324 3715,-2410 3715,-2465 3730,-2480 3772.06,-2480 3789,-2496.94 3789,-2616 v2(3730,-2675)
PE2: CPU1.1 S1.10 | length 884.1
  Top Layer w10: CPU1.1@3447.24,-2186.22 3562.22,-2186.22 3820,-2444 3820,-2660 3695,-2785 S1.10@3695,-2796.77
PE3: CPU1.2 S1.9 | length 900.3
  Top Layer w10: CPU1.2@3447.24,-2166.54 3577.54,-2166.54 3855,-2444 3855,-2674 3795,-2734 S1.9@3795,-2796.77
PE4: CPU1.3 S1.8 | length 914.9
  Top Layer w10: CPU1.3@3447.24,-2146.85 3583,-2146.85 3895,-2458.85 S1.8@3895,-2796.77
PE5: CPU1.4 S1.7 | length 984.2
  Top Layer w10: CPU1.4@3447.24,-2127.17 3597,-2127.17 3995,-2525.17 S1.7@3995,-2796.77
PE6: CPU1.5 S1.6 | length 1047.7
  Top Layer w10: CPU1.5@3447.24,-2107.48 3601,-2107.48 4095,-2601.48 S1.6@4095,-2796.77
PE7: CPU1.38 D14.1 | length 1860.6
  Top Layer w10: CPU1.38@3150,-1652.76 3150,-1515 3225,-1440 v2(3225,-1325) 3230,-1320 3230,-1120 3408.02,-941.98 D14.1@4450.98,-941.98
PE8: CPU1.39 | length 441.3
  Top Layer w10: CPU1.39@3130.32,-1652.76 3130.32,-1509.68 3175,-1465 v2(3175,-1230)
PE9: CPU1.40 | length 333.7
  Top Layer w10: CPU1.40@3110.63,-1652.76 3111,-1652.39 3111,-1484 3125,-1470 v2(3125,-1325)
PE10: CPU1.41 | length 429.4
  Top Layer w10: v2(3075,-1230) 3075,-1460 3090.94,-1475.94 CPU1.41@3090.94,-1652.76
PE11: CPU1.42 | length 346.9
  Top Layer w10: v2(3025,-1325) 3025,-1440 3071.26,-1486.26 CPU1.42@3071.26,-1652.76
PE12: CPU1.43 | length 454.5
  Top Layer w10: v2(2975,-1230) 2975,-1415 3051.57,-1491.57 CPU1.43@3051.57,-1652.76
PE13: CPU1.44 | length 372
  Top Layer w10: v2(2925,-1325) 2925,-1395 3031.89,-1501.89 CPU1.44@3031.89,-1652.76
PE14: CPU1.45 P8.4 | length 2034.5
  Top Layer w10: v2(2875,-1230) 2875,-1375 3012.2,-1512.2 CPU1.45@3012.2,-1652.76
  Bottom Layer w10: P8.4@1921,-1195 1921,-919 2041,-799 2609,-799 2649.5,-839.5 2875,-1065 v2(2875,-1230)
PE15: CPU1.46 P8.5 | length 1852.1
  Top Layer w10: v2(2825,-1325) 2825,-1360 2992.52,-1527.52 CPU1.46@2992.52,-1652.76
  Bottom Layer w10: P8.5@2021,-1195 2021,-923 2112,-832 2566,-832 2825,-1091 v2(2825,-1325)
POW_ON: CPU1.59 R42.2 R63.2
PWRKEY: *.14 Q14.3
RESET: *.13 Q15.3
RESET_CTL: CPU1.60 Q15.2 R65.2 | length 2346.6
  Top Layer w10: 1309.43,-2670 v2(2405,-2670) ; v2(2425,-1930) 2545,-1930 2584.06,-1890.94 CPU1.60@2852.76,-1890.94
  Bottom Layer w10: v2(2405,-2670) 2496,-2579 2496,-2304.83 2470,-2278.83 2470,-1975 v2(2425,-1930)
RF_GNSS: *.54
RF_MAIN: C29.2 R52.1
RING: *.50 R69.1
RTS: *.11 Q11.2
RXD: *.10 Q10.3 R55.2
SWCLK: CPU1.76 P10.7 | length 1355.2
  Top Layer w10: P10.7@1800,-2550 1870,-2620 2640,-2620 v2(2680,-2580) 2913.78,-2346.22 CPU1.76@2913.78,-2247.24
SWDIO: CPU1.72 P10.2 | length 1312.6
  Top Layer w10: P10.2@1800,-2450 1880,-2370 2280,-2370 2380,-2470 2550,-2470 2671,-2349 2671,-2275.17 2819,-2127.17 CPU1.72@2852.76,-2127.17
TDI: CPU1.77 | length 512
  Top Layer w10: v2(2730,-2675) 2730,-2555 2933.46,-2351.54 CPU1.77@2933.46,-2247.24
TDO: CPU1.89 | length 494.7
  Top Layer w10: CPU1.89@3169.69,-2247.24 3169.69,-2439.69 3260,-2530 3295,-2530 3330,-2565 v2(3330,-2655)
TERM_ON_CTL: CPU1.61 | length 1444.5
  Top Layer w10: 2292,-2820 2318,-2846 v2(2405,-2846) ; v2(2520,-1980) 2541,-1980 2610.37,-1910.63 CPU1.61@2852.76,-1910.63
  Bottom Layer w10: v2(2405,-2846) 2518,-2733 2518,-2384 2575,-2327 2575,-2035 v2(2520,-1980)
TXD: *.9 Q9.2
UIM_CLK: *.31 R44.2
UIM_DATA: *.30 R46.2
UIM_PRESENT: *.33
UIM_RESET: *.32 R45.2
VBAT: *.20 *.21 *.22 C3.2 C4.1 C19.1 C20.2 C21.2 D3.1 L1.2 R1.1 R33.1 R38.2 R40.1 | length 3647
  Top Layer w20: R1.1@1530,-1314 1530,-931 1718,-743 2329,-743 2602,-470 3887,-470 3995,-362 3995,-280 ; R33.1@3995,-219 3995,-280 ; R40.1@4390,-219 4329,-280 3995,-280
VCC: C5.2 C28.2 CPU1.11 CPU1.21 CPU1.22 CPU1.28 CPU1.50 CPU1.75 CPU1.100 D1.1 D3.2 D10.1 D17.1 P3.1 P4.1 P8.7 P9.15 P10.6 P11.1 P12.1 P13.1 R23.1 R24.1 R29.2 R43.1 R53.1 R57.1 U2.3 U3.8 U4.8 U5.8 U6.10 | length 22444.8
  Top Layer w10: CPU1.75@2852.76,-2186.22 2903.78,-2186.22 3140,-1950 ; CPU1.50@2913.78,-1652.76 2913.78,-1723.78 3140,-1950 ; 3346.85,-1790.67 CPU1.28@3346.85,-1652.76 ; CPU1.22@3447.24,-1772.83 CPU1.21@3447.24,-1792.52 3297.48,-1792.52 3222.5,-1867.5 ; R29.2@3753.66,-2449.77 3753.66,-2413 3587.91,-2247.24 CPU1.100@3386.22,-2247.24 3386.22,-2196.22 3140,-1950 ; R43.1@4165,-1881 4200,-1916 4200,-2110 4149,-2161 3764.63,-2161 3593,-1989.37 CPU1.11@3447.24,-1989.37 3344.37,-1989.37 3222.5,-1867.5 ; 3140,-1950 3222.5,-1867.5
  Top Layer w20: v2@880,-2455.59 U5.8@949.76,-2455.59 ; v3(4456,-1870) 4666,-1870 4694.41,-1898.41 U4.8@4694.41,-1949.76 4694.41,-1999.41 4748,-2053 4859,-2053 4906,-2100 4906,-2225 4873,-2258 4798,-2258 4704.41,-2351.59 U3.8@4704.41,-2389.76
  Top Layer w30: C5.2@2097.96,-1627.28 2097.96,-1448.49 2107,-1439.45 ; v3(2544,-1360) 2546,-1358 2546,-847 2709.04,-683.96 v3(2709.04,-541.96)
  Top Layer w50: P10.6@1900,-2550 2582,-2550 v2(2666.92,-2465.08)
  Top Layer w60: D3.2@1881.21,-1856.98 v3(1983.02,-1856.98) 2010,-1830 2010,-1439.45 ; D1.1@2237.32,-2015 2280,-1972.32 2280,-1439.45 ; 2310,-1421 P13.1@2310,-1360 v3(2544,-1360) v2@2829,-1645
  Bottom Layer w20: v2(880,-2455) 1065,-2640 1810,-2640 P10.6@1900,-2550
  Bottom Layer w30: P8.7@701,-285 1705,-285 1961.96,-541.96 v3(2709.04,-541.96) 5021.04,-541.96 5174.3,-388.7 P4.1@5595,-388.7 ; v2(2850,-1645) 2850,-1572 2881,-1541 3367,-1541 3696,-1870 v3@4453,-1870 ; 3164.13,-3240.87 P12.1@3405,-3000 ; U6.10@4871.49,-4190.51 5523.69,-3538.31 P3.1@5595,-3538.31
  Bottom Layer w50: v2(2666.92,-2465.08) 2614,-2518 2614,-2701 3289.82,-3376.82 3289.82,-3645.7 3289.82,-3815.18 3209,-3896 3209,-4255 3244,-4290 4766,-4290 ; 4807,-4290 4766,-4290 ; U6.10@4871.49,-4190.51 4871.49,-4253.51 4835,-4290 4766,-4290
  Bottom Layer w60: P10.6@1900,-2550 1951,-2550 1989,-2512 1989,-2349 P11.1@1900,-2260 1900,-1940 v3(1983.02,-1856.98)
VUIM: *.29 C18.2 Card1.1 D16.3 R48.2
WAKEUP_CTL: CPU1.62 | length 1832.3
  Top Layer w10: 2220.23,-3118.66 2336.34,-3118.66 v2(2405,-3050) ; v2(2425,-2030) 2535,-2030 2635,-1930 2852.44,-1930 CPU1.62@2852.76,-1930.31
  Bottom Layer w10: v2(2405,-3050) 2340,-2985 2340,-2600 2470,-2470 2470,-2315 2390,-2235 2389,-2235 2389,-2066 v2(2425,-2030)
pads on no net: *.2 *.3 *.5 *.6 *.7 *.8 *.16 *.25 *.26 *.27 *.28 *.36 *.37 *.38 *.39 *.40 *.41 *.43 *.44 *.45 *.46 *.47 *.48 *.49 *.58 *.59 *.60 *.61 *.62 *.63 *.64 *.65 *.67 C24.1 C24.2 C26.1 C26.2 Card1.4 CPU1.6 CPU1.73 E1.2 E1.4 E2.2 E2.4 P10.3 P10.4 P10.5 P10.9 P10.10 P13.6 P13.10 U6.6
copper on no net: | length 4074.3
  Top Layer w8: 939,-2840 978.09,-2840 1006.79,-2811.31
  Top Layer w10: 847.88,-2828.73 900.06,-2776.54 936.82,-2776.54 ; 3447.24,-1890.94 3525,-1890.94 3595.94,-1820 v2(3780,-1820) ; 3447.24,-1871.26 3511.37,-1871.26 3662.63,-1720 v2(3780,-1720) ; 5180,-2239.66 v2(5180,-2130)
  Bottom Layer w10: v2(3780,-1820) 4335,-1820 4371,-1784 4834,-1784 v2(5180,-2130) ; v2(3780,-1720) 5175,-1720 v2(5220,-1765)
  other v2: 6746,-158

## Polygon pours and split planes (outlines as drawn)
NetD2_1 on Top Layer "Bottom Layer-No Net" (solid, remove dead copper, pour order 1005): 489.29,-1727 417,-1727 417,-2027 500,-2027 500,-1727
DGND on Top Layer "DGND-BOT" (solid, remove dead copper, pour order 1006): 55,-1627 305,-1627 342,-1664 342,-1867 308,-1901 293,-1916 162,-1916 75,-1916 55,-1896

## Keep-outs
Keep-Out Layer:
  circle w10: c4190,-440 r49.5
  circle w10: c4190,-1315 r49.5
  circle w10: c3370,-2745 r55.9
  lines w10: 0,-4126 0,-3961 cw(c50,-3961) 50,-3911 384,-3911 ccw(c382,-3860) 433,-3858 ; 0,-4114 ccw(c210,-4121) 203,-4331 ; 0,-2043.11 0,-1984 ; 0,-1996 0,-1887 ; 0,-1994 0,-1885 ; 0,-1982 0,-2041.11 ccw(c45.89,-2041.11) 45.89,-2087 383.91,-2087 ; 0,-1906 0,-185 ; 0,-198.85 cw(c196.2,-198.2) 196.85,-2 ; 0,-196.85 cw(c196.2,-196.2) 196.85,0 2795.28,0 2804.33,0 cw(c2804.33,-50) 2854.33,-50 2854.33,-375 ccw(c2904.33,-375) 2904.33,-425 2913.39,-425 3779.53,-425 ; 196.85,-4330.71 3425.2,-4330.71 ; 378,-2087 cw(c380.5,-2139.5) 433,-2137 ; 433.07,-3861 433.07,-2137.16 ; 3426.2,-4330.71 6116,-4330.71 ; 3788.58,-425 ccw(c3788.58,-375) 3838.58,-375 ; 3838.58,-370 3838.58,-45 cw(c3883.58,-45) 3883.58,0 3897.64,0 5703.03,0 cw(c5703.03,-45) 5748.03,-45 5748.03,-401.4 ; 5747.53,-392.95 ccw(c5826.09,-400.7) 5826.19,-479.64 ; 5826.09,-480.14 6253,-480.14 ; 5866,-3867 ccw(c5910,-3867) 5910,-3911 6249,-3911 ; 5866,-936 cw(c5898,-934) 5896,-902 6267,-902 ccw(c6264,-867) 6299,-864 ; 5866.14,-3866 5866.14,-934 ; 6115,-4331 ccw(c6096,-4128) 6299,-4109 ; 6249,-3913 cw(c6249,-3963) 6299,-3963 6299,-3975 ; 6251,-480 cw(c6252.5,-526.5) 6299,-525 ; 6299,-4117 6299,-3961 ; 6299,-3973 6299,-3961 ; 6299,-524 6299.21,-868 ; 6249,-3911 cw(c6249,-3961) 6299,-3961 ; 6249,-3911 cw(c6249,-3961) 6299,-3961

## Other copper
Top Layer:
  rectangle net 24V+: 355,-1150 660,-1020
  rectangle net 24V+: 355,-1120 485,-605
  rectangle net 24V+: 575,-1800 660,-1070
  rectangle net VBAT: 1740,-1765 1840,-1730
  rectangle net VBAT: 1425,-1890 1755,-1725
  rectangle net 1.8V: 1695,-1555 1885,-1505
  rectangle net 24V+: 1260,-1640 1390,-1530
  rectangle net VCC: 2861,-1663 2913,-1633
  rectangle net INVCC: 574,-2188 658,-1893
  rectangle net DGND: 26,-2013 104,-1546
  rectangle net VCC: 1864,-1480 2355,-1404
  rectangle net VBAT: 955,-2969 1033.53,-2905
  pour cut-out: 5650,-3258 5679,-3229 5679,-3079 5661,-3061 5492,-3061 5439,-3008 5439,-2852 5375,-2788 5269,-2788 5219,-2738 5219,-2424 5135,-2340 5135,-2311 5127,-2303 5065,-2303 5053,-2291 4822,-2291 4738,-2375 4738,-2455 4788,-2505 4819,-2505 4864,-2550 4864,-2837 5285,-3258
  pour cut-out: 2487,-1398 2525,-1398 2818.59,-1691.59 2818.59,-1696.45 2805.96,-1696.45 2805.62,-1696.11
  pour cut-out: 4768,-2357 4828,-2297 4896,-2297 4908,-2285 4908,-2253 4886,-2253 4861,-2278 4800,-2278 4734,-2344 4734,-2357
  pour cut-out: 1427,-2255 1427,-2237 1430,-2234 1428,-2232 1093,-2232 1090,-2235 1090,-2275 1100,-2265 1421,-2265
  pour cut-out: 523.5,-2505.5 578.5,-2450.5 732.5,-2450.5 748.5,-2434.5 748.5,-2399.5 829.5,-2318.5 1231.5,-2318.5 1231.5,-2585.5 1075.5,-2741.5 901.5,-2741.5 792.5,-2850.5 547.5,-2850.5 523.5,-2826.5
Bottom Layer:
  pour cut-out: 0,-1552 422,-1552 478,-1608 478,-1947 418,-2007 48,-2007 0,-1959
  pour cut-out: 5506,-1797 5665,-1797 5684,-1816 5684,-1971 5653,-2002 5539,-2002 5493,-1956 5493,-1810
  pour cut-out: 5506,-3056.84 5665,-3056.84 5684,-3075.84 5684,-3230.84 5653,-3261.84 5539,-3261.84 5493,-3215.84 5493,-3069.84
Multi-Layer:
  pour cut-out: 567,-2483 554,-2496 554,-2797 575,-2818 664,-2818 695,-2787 695,-2515 663,-2483

## Silkscreen, mask and mechanical layers (free items; w line width, h text height)
Top Overlay:
  text "Vcc" at 5714,-430 h36 r90
  text "GND" at 5705,-520 h36
  text "DAT4" at 5705,-610 h36
  text "SCK" at 5708,-717.24 h36
  text "24V+O" at 5672,-1039 h36
  text "GND" at 5695,-1150.16 h36
  text "DAT5" at 5703,-1247.16 h36
  text "SCK" at 5708,-1347.16 h36
  text "24V+O" at 5667,-1670 h36
  text "GND" at 5695,-1780.08 h36
  text "AIO2" at 5703,-1877.08 h36
  text "BIO2" at 5708,-1977.08 h36
  text "24V+" at 848,-2196 h36 r90
  text "24V+O" at 5674,-2304 h36
  text "GND" at 5700,-2390 h36
  text "GND" at 840,-2405 h36 r90
  text "DAT1" at 5703,-2507 h36
  text "DAT2" at 5708,-2607 h36
  text "AIO1" at 840,-2620 h36 r90
  text "BIO1" at 564,-2915 h36
  text "24VO" at 5690,-2940 h36
  text "GND" at 5695,-3039.92 h36
  text "AIO3" at 5703,-3136.92 h36
  text "BIO3" at 5708,-3236.92 h36
  text "VCC" at 5695,-3574.84 h36
  text "GND" at 5695,-3669.84 h36
  text "DAT3" at 5703,-3766.84 h36
  text "SCK" at 5708,-3866.84 h36
Mechanical 1:
  circle w10: c3370,-2745 r55.9

## Text inside footprints (layer, text, board x,y; h text height)
C1: Top Overlay "+" at 440,-830 h36 r90
C4: Top Overlay "+" at 446,-1387 h36 r90
P13: Top Overlay "10" at 2235,-850 h60 r180; Top Overlay "5" at 2325,-850 h60 r180; Top Overlay "1" at 2390,-1340 h60 r180